# Altium PCB Central_PCB.pcbdoc
Units mil, origin at the board's own origin, x right, y up, seen from the top; angles counter-clockwise.
Board outline 86381 x 3047.24 mil, 2 copper layers (Top Layer, Bottom Layer); 49 components, 120 nets, 266 pads, 28 vias.
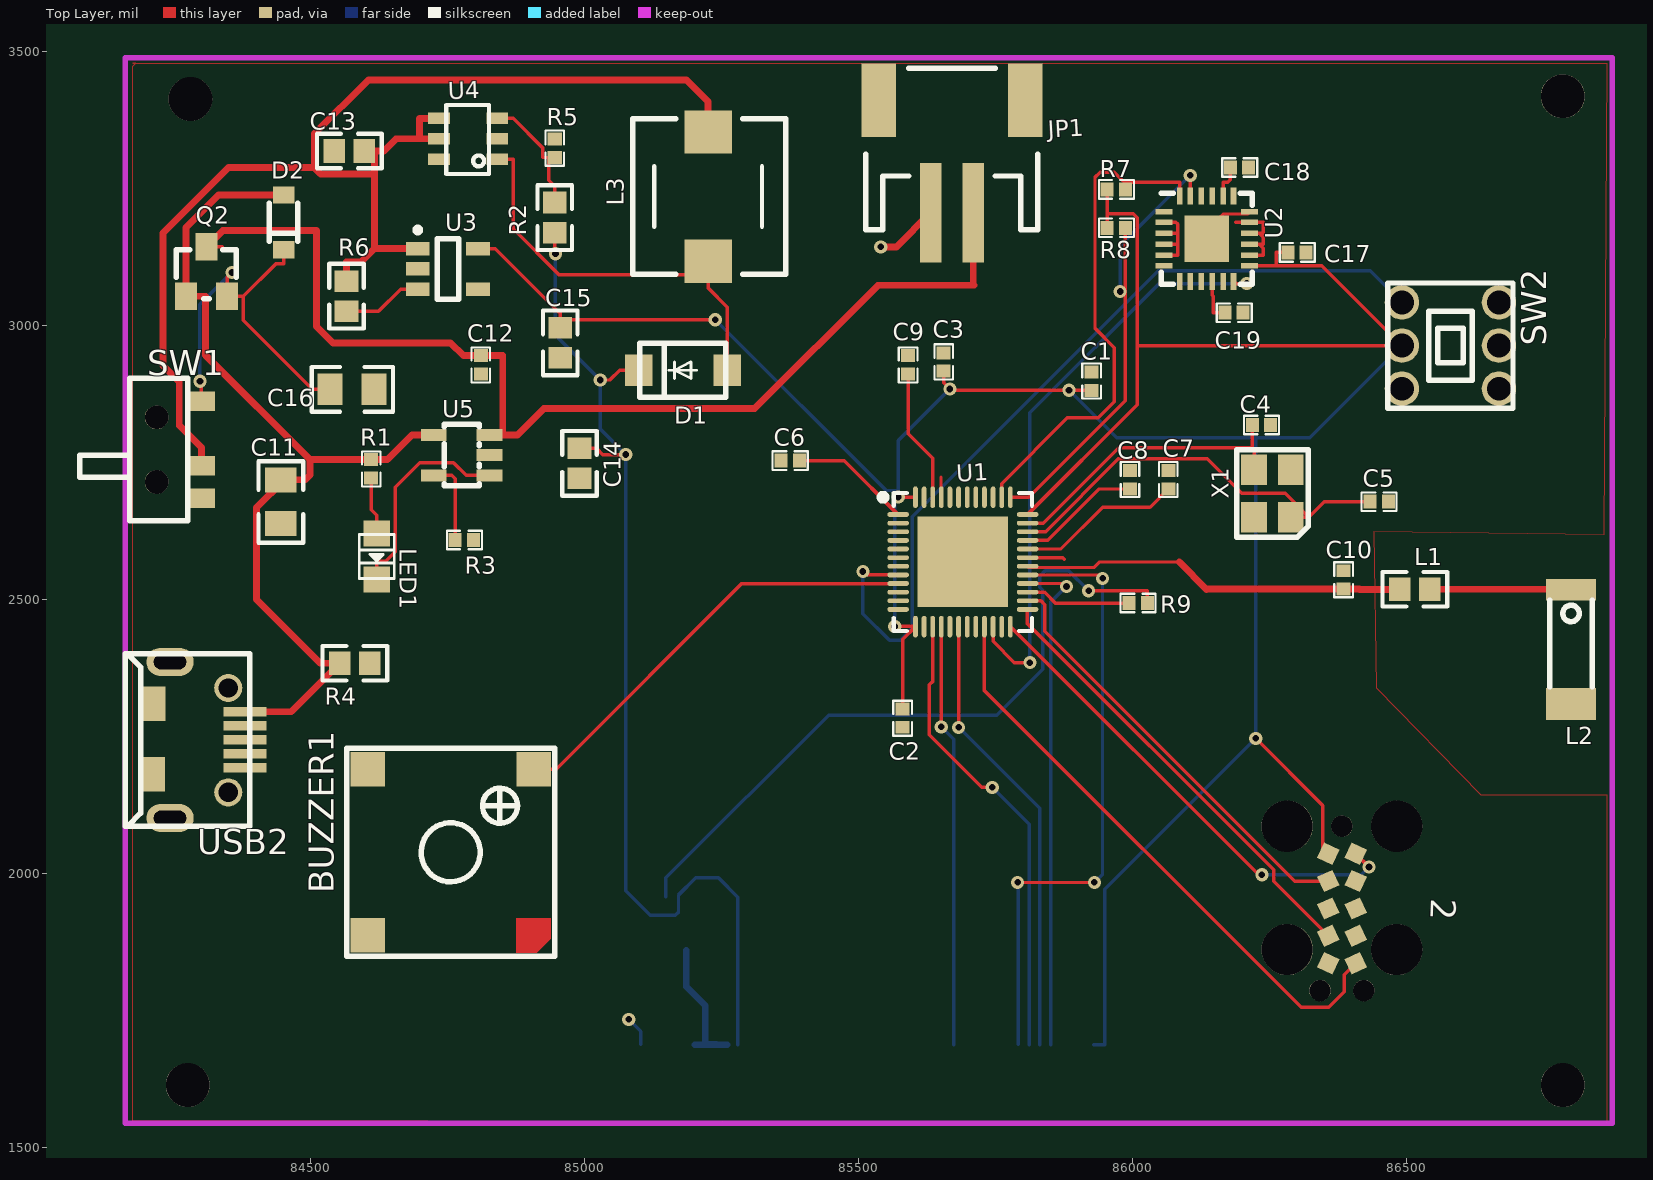
[diagram p0: Top Layer view]
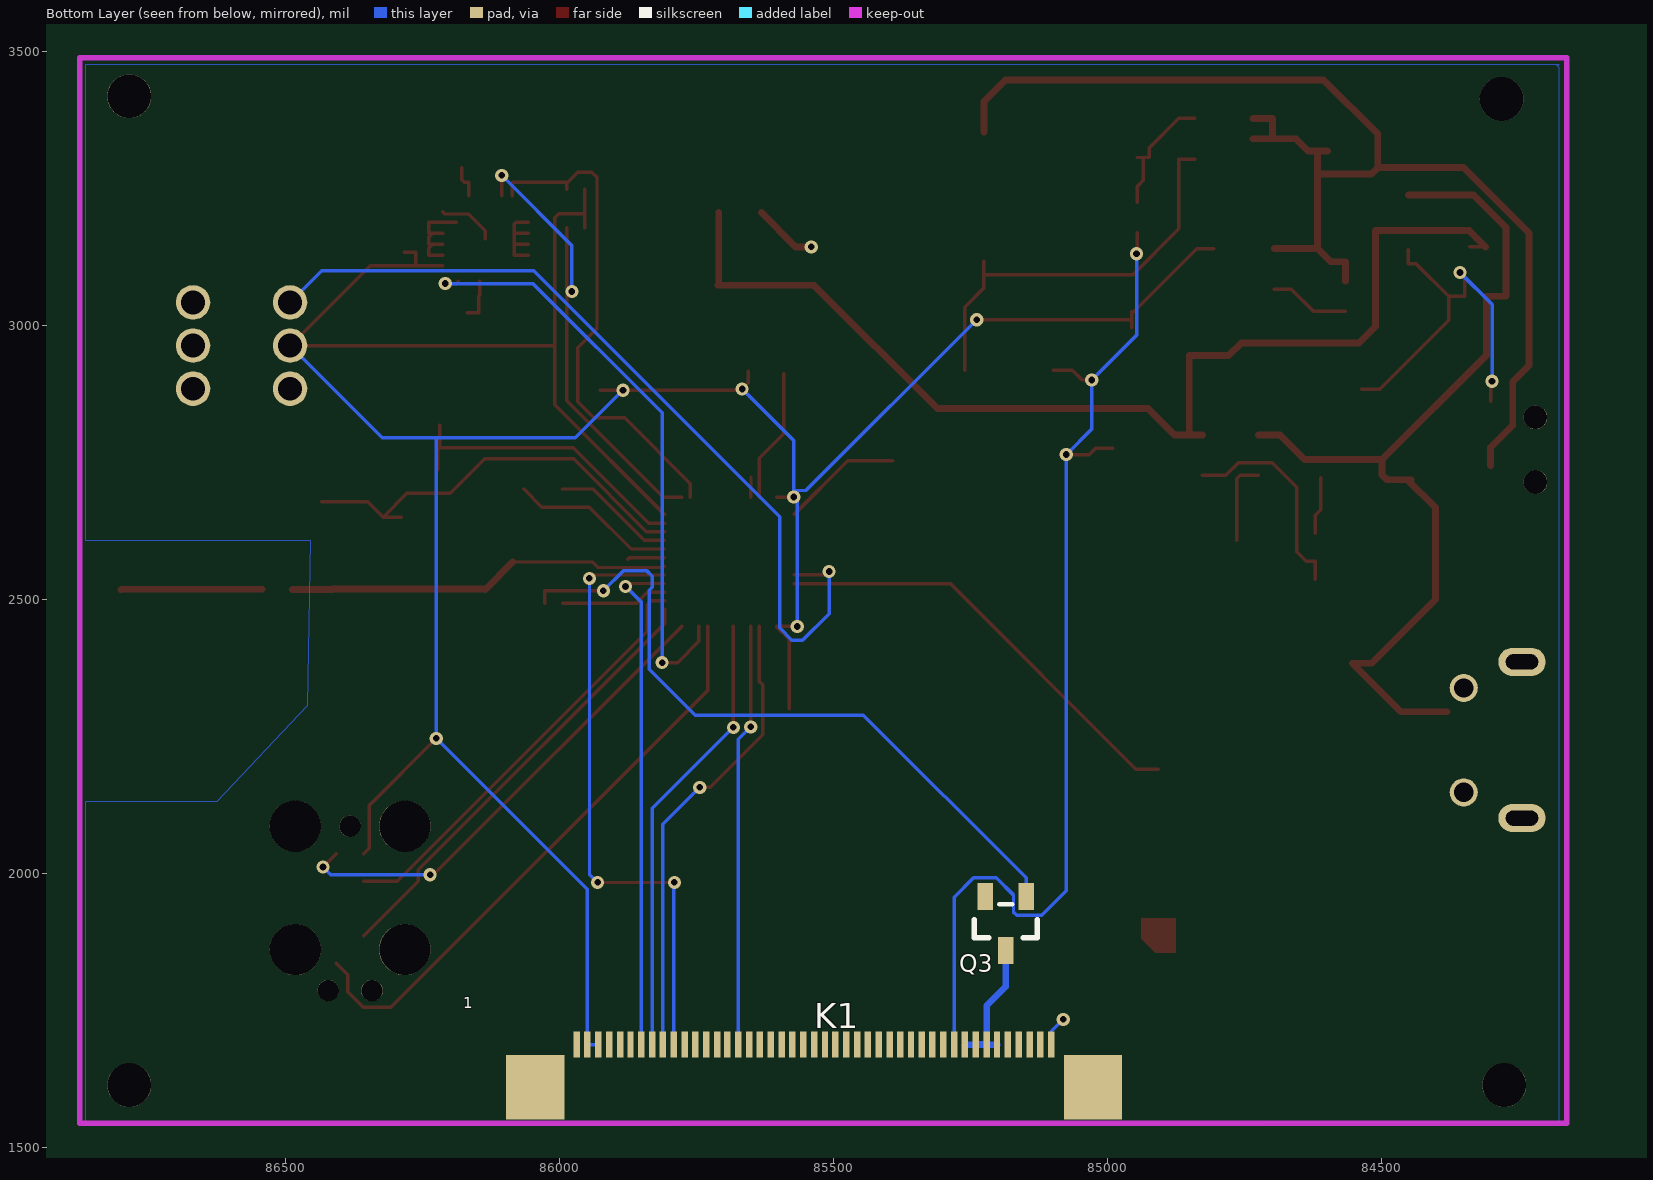
[diagram p1: Bottom Layer view, seen from below]

## Layer stack, top to bottom
Top Layer: signal copper (thickness not stored)
Dielectric: dielectric 12.6, FR-4, Dk 4.8
Bottom Layer: signal copper (thickness not stored)

## Board outline
87381,1000 1000,1000 1000,4047.24 87381,4047.24

## Components (designator, comment, footprint, x,y, rotation, side; value= is the part's Value field where it differs from the comment)
2 "J-LINK" J-LINK_NEEDLE_ADAPTER 86401,1943.62 r270 top
BUZZER1 "GSC8530YA-16R2700" BUZZER-8.5X8.5-4P-SMD 84756,2038.62 r90 top
C1 "4u7" 0402 85926,2898.62 r270 top
C2 "100n" 0402 85581,2283.62 r90 top
C3 "100n" 0402 85656,2933.62 r270 top
C4 "12p" 0402 86236,2818.62 r180 top
C5 "12p" 0402 86451,2678.62 r0 top
C6 "100n" 0402 85376,2753.62 r0 top
C7 "100n" 0402 86066,2718.62 r270 top
C8 "100n" 0402 85996,2718.62 r270 top
C9 "1u" 0402 85591,2928.62 r90 top
C10 "0.8p" 0402 86386,2535.82 r270 top
C11 "4µ7" 0805 84446,2678.62 r90 top
C12 "4µ7" 0402 84811,2928.62 r90 top
C13 "22uF" 0603#1 84571,3318.62 r0 top
C14 "22uF" 0603#1 84991,2748.62 r270 top
C15 "10uF" 0603#1 84956,2968.62 r90 top
C16 "1µ" 0805 84576,2883.62 r180 top
C17 "100n" 0402 86301,3133.62 r180 top
C18 "2.2n" 0402 86196,3288.62 r180 top
C19 "100n" 0402 86186,3023.62 r180 top
D1 "SS34" SMA(DO-214AC) 85176,2918.62 r180 top
D2 "NSR0320" SOD-323 84451,3188.62 r270 top
JP1 "Battery" JST-2-SMD 85671,3308.62 r0 top
K1 "68714514022" 68714514022 85546,1663.62 r0 bottom
L1 "3.9n" 0603#1 86516,2518.62 r0 top
L2 "Sunlord" ANT-SMD2P-5.2X2.1 86801,2413.62 r180 top
L3 "22uH" 7*7*4 85226,3353.62 r270 top
LED1 "charge" LED_0805 84621,2578.62 r270 top
Q2 "SI2301" "SOT-23 323" 84306,3098.62 r0 top
Q3 "2n3904S-RTK/PS" SOT-23_1 85186,1908.62 r180 bottom
R1 "470" 0402 84611,2738.62 r90 top
R2 "7.5k" 0603#2 84946,3228.62 r270 top
R3 "2k" 0402 84781,2608.62 r180 top
R4 "100k" 0603#1 84581,2383.62 r180 top
R5 "1k" 0402 84946,3323.62 r270 top
R6 "100k" 0603#1 84566,3053.62 r270 top
R7 "10k" 0402 85971,3248.62 r180 top
R8 "10k" 0402 85971,3178.62 r180 top
R9 "1k" 0402 86011,2493.62 r0 top
SW1 "K3-1290S-J1" K3-1290S-J1 84301,2773.62 r0 top
SW2 "XKB5858-Z" SW-DIP-5.8X5.8X10 86581,2963.62 r270 top
U1 "2.4GHz" QFN-48_6X6X04P 85691,2568.62 r0 top
U2 "MPU6050" QFN50P400X400X95-25T265X275N 86136,3158.62 r270 top
U3 "AP2112K-3.3TRG1" SOT-25 84751,3103.62 r180 top
U4 "MT3608" SOT-23-6 84841,3303.62 r180 top
U5 "MCP73831" SOT23-5 84776,2763.62 r90 top
USB2 "micro USBFemale" MICRO-USB-1 84296,2243.62 r180 top
X1 "- 32MHz" CRYSTAL-SMD-3225 86256,2693.62 r90 top

## Footprints (in the part's own frame and the unit in brackets; to place one, negate y for a bottom-side part, rotate by r counter-clockwise, add the part's x,y. Pads: shape width x height; smd on the part's side, far side on the other; paste and mask are expansions set on the pad)
7*7*4 [mil]
  rect 79x86.61 smd: 1(0,0) 2(236,0)
  silkscreen extent -24,-138 260,142
0402 [mm]
  rect 0.6x0.65 smd: 1(-0.424,0) 2(0.424,0)
  silkscreen extent -0.82,-0.43 0.81,0.43
0603#1 [mm]
  rect 1x1.1 smd: 1(-0.7,0) 2(0.7,0)
  silkscreen extent -1.5,-0.8 1.5,0.8
0603#2 [mm]
  rect 1x1.1 smd: 1(0.1,0) 2(1.5,0)
  silkscreen extent -0.7,-0.8 2.3,0.8
0805 [mm]
  rect 1.16x1.45 smd: 1(-1.016,0) 2(1.016,0)
  silkscreen extent -1.9,-1.03 1.87,1.04
68714514022 [mil]
  rect 11.8x47.2 smd: 1(423,-24) 2(404,-24) 3(384,-24) 4(364,-24) 5(344,-24) 6(325,-24) 7(305,-24) 8(285,-24) 9(266,-24) 10(246,-24) 11(226,-24) 12(207,-24) 13(187,-24) 14(167,-24) 15(148,-24) 16(128,-24) 17(108,-24) 18(89,-24) 19(69,-24) 20(49,-24) 21(30,-24) 22(10,-24) 23(-10,-24) 24(-30,-24) 25(-49,-24) 26(-69,-24) 27(-89,-24) 28(-108,-24) 29(-128,-24) 30(-148,-24) 31(-167,-24) 32(-187,-24) 33(-207,-24) 34(-226,-24) 35(-246,-24) 36(-266,-24) 37(-285,-24) 38(-305,-24) 39(-325,-24) 40(-344,-24) 41(-364,-24) 42(-384,-24) 43(-404,-24) 44(-423,-24) 45(-443,-24)
  rect 106.3x118.1 smd: 46(499,54) 47(-519,54)
ANT-SMD2P-5.2X2.1 [mm]
  rect 2.3x1.5 smd: 2(0,2.648)
  rect 2.3x1 smd: ANT(0,-2.648)
  silkscreen extent -0.99,-2.15 0.99,1.86
BUZZER-8.5X8.5-4P-SMD [mm]
  rect 1.6x1.6 smd: 1(3.85,-3.85) 2(3.85,3.85) 3(-3.85,3.85)
  round 0 smd: 4(-3.85,-3.85)
  Top Layer region: -4.65,-3.05 -3.05,-3.05 -3.05,-4.65 -4,-4.65 -4.65,-4
  silkscreen extent -4.83,-4.83 4.83,4.83
CRYSTAL-SMD-3225 [mm]
  rect 1.4x1.2 smd: 1(-1.1,-0.85) 2(1.1,-0.85) 3(1.1,0.85) 4(-1.1,0.85)
  silkscreen extent -2.03,-1.65 2.03,1.65
J-LINK_NEEDLE_ADAPTER [mm]
  rect 0.786x0.786 smd rot 155.63: P$1(-2.35,-1.095) P$10(-2.35,0.175)
  rect 0.786x0.786 smd rot 24.37: P$2(-1.08,-1.095) P$3(0.19,-1.095) P$6(2.73,0.175)
  rect 0.786x0.786 smd rot 114.37: P$4(1.46,-1.095) P$7(1.46,0.175) P$8(0.19,0.175)
  rect 0.786x0.786 smd rot 65.63: P$5(2.73,-1.095) P$9(-1.08,0.175)
  round 2.375 hole 2.375 unplated: ""(-3.62,2.08) ""(-3.62,-3) ""(2.095,2.08) ""(2.095,-3)
  round 0.991 hole 0.991 unplated: ""(-3.62,-0.46) ""(4,-1.475) ""(4,0.555)
JST-2-SMD [mil]
  rect 39.4x181.1 smd: 1(-39,-102.5) 2(39,-102.5)
  rect 63x133.9 smd: NC1(-134,102.5) NC2(134,102.5)
  silkscreen extent -157,-134 157,162
K3-1290S-J1 [mm]
  rect 1.25x0.9 smd: 1(0,2.25) 2(0,-0.75) 3(0,-2.25)
  round 1.1 hole 1.1 unplated: ""(-2.075,-1.5) ""(-2.075,1.5)
  silkscreen extent -5.63,-3.3 -0.63,3.3
LED_0805 [mil]
  rect 48x48 smd: 1(-42,0) 2(42,0)
  silkscreen extent -40,-32 40,32
MICRO-USB-1 [mm]
  round 1.3 hole 0.9: 0(-1.371,2.431) 0(-1.371,-2.41)
  oval 2.2x1.3 hole 0.7 slot 1.5 at 0 deg: 0(1.329,3.619) 0(1.329,-3.619)
  rect 1.2x1.6 smd: 0(2.14,-1.683) 0(2.156,1.596)
  rect 2x0.45 smd: 1(-2.156,-1.31) 2(-2.156,-0.66) 3(-2.156,-0.01) 4(-2.156,0.64) 5(-2.156,1.29)
  silkscreen extent -2.36,-4 3.4,4
QFN50P400X400X95-25T265X275N [mil]
  rect 10.2x31.1 smd: 1(-49,-78) 2(-30,-78) 3(-10,-78) 4(10,-78) 5(30,-78) 6(49,-78) 13(49,78) 14(30,78) 15(10,78) 16(-10,78) 17(-30,78) 18(-49,78)
  rect 31.1x10.2 smd: 7(78,-49) 8(78,-30) 9(78,-10) 10(78,10) 11(78,30) 12(78,49) 19(-78,49) 20(-78,30) 21(-78,10) 22(-78,-10) 23(-78,-30) 24(-78,-49)
  rect 84.6x80.7 smd: 25(0,-0.03)
  silkscreen extent -83,-83 83,83
QFN-48_6X6X04P [mm]
  oval 1x0.22 smd: 1(-3,2.201) 2(-3,1.8) 3(-3,1.401) 4(-3,0.999) 5(-3,0.601) 6(-3,0.199) 7(-3,-0.199) 8(-3,-0.601) 9(-3,-0.999) 10(-3,-1.401) 11(-3,-1.8) 12(-3,-2.201) 25(3,-2.201) 26(3,-1.8) 27(3,-1.401) 28(3,-0.999) 29(3,-0.601) 30(3,-0.199) 31(3,0.199) 32(3,0.601) 33(3,0.999) 34(3,1.401) 35(3,1.8) 36(3,2.201)
  oval 0.22x1 smd: 13(-2.198,-3) 14(-1.8,-3) 15(-1.401,-3) 16(-0.999,-3) 17(-0.601,-3) 18(-0.199,-3) 19(0.199,-3) 20(0.601,-3) 21(0.999,-3) 22(1.401,-3) 23(1.8,-3) 24(2.201,-3) 37(2.201,3) 38(1.8,3) 39(1.401,3) 40(0.999,3) 41(0.601,3) 42(0.199,3) 43(-0.199,3) 44(-0.601,3) 45(-0.999,3) 46(-1.401,3) 47(-1.8,3) 48(-2.198,3)
  rect 4.2x4.2 smd: 49(0.001,0.001)
  silkscreen extent -3.85,-3.2 3.2,3.2
SMA(DO-214AC) [mil]
  rect 50x57.9 smd: 1(-85,0) 2(77,0)
  silkscreen extent -82,-49 75,49
SOD-323 [mm]
  rect 0.8x1 smd: 1(-1.27,0) 2(1.27,0)
  silkscreen extent -0.89,-0.66 0.89,0.66
SOT23-5 [mil]
  rect 21.7x47.2 smd: 1(-37,-51) 2(0,-51) 3(37,-51) 4(37,51) 5(-37,51)
  silkscreen extent -56,-32 56,32
"SOT-23 323" [mil]
  rect 40x50 smd: 1(-33,-45) 2(42,-45) 3(4,45)
  silkscreen extent -51,-50 59,40
SOT-23-6 [mm]
  rect 1x0.55 smd: 1(0,0) 2(0,-0.95) 3(0,-1.9) 4(2.7,-1.9) 5(2.7,-0.95) 6(2.7,0)
  silkscreen extent 0.38,-2.51 2.36,0.69
SOT-23_1 [mm]
  rect 0.7x1.25 smd: 1(-0.95,1.25) 2(0.95,1.25) 3(0,-1.25)
  silkscreen extent -1.46,-0.65 1.46,0.9
SOT-25 [mil]
  rect 43.5x24.5 smd: 1(55,-37) 2(55,0) 3(55,37) 4(-55,37) 5(-55,-37)
  silkscreen extent -20,-76 60,55
SW-DIP-5.8X5.8X10 [mm]
  round 1.6 hole 1.1: 1(-2,-2.25) 2(0,-2.25) 3(2,-2.25) 4(2,2.25) 5(0,2.25) 6(-2,2.25)
  silkscreen extent -2.9,-2.9 2.9,2.9

## Free pads (board coordinates)
  round 80 hole 80 unplated: ""(84276,1613.62) ""(84281,3413.62) ""(86786,1613.62) ""(86786,3418.62)

## Via types
v1: diameter 24.02, hole 12.2, Top Layer to Bottom Layer, 23 vias
v2: diameter 24, hole 12, Top Layer to Bottom Layer, 5 vias

## Nets (pads, with @x,y where several pads share a name; then routed paths per layer and width w, separated by ;. In a path a pad name is that pad's centre, name@x,y a point inside that pad or via, vN(x,y) a via of type N, cw(c..) or ccw(c..) an arc to the next point about the centre after c; other vN are vias at no path point)
2_P$5: 2.P$5
2_P$7: 2.P$7
2_P$8: 2.P$8
3.3V: 2.P$1 C1.2 C2.2 C3.2 C15.2 C17.2 K1.2 K1.3 R7.2 R8.2 SW2.2 U1.13 U1.36 U1.48 U2.13 U3.5 | length 5824.3
  Top Layer w6.3: U3.5 84837.3,3140.62 84952.5,3025.42 84956,3025.42 C15.2@84956,3010.82 ; C15.2@84956,2996.12 C15.2@84956,3010.82 ; v1(85239.1,3010.82) C15.2@84956,3010.82 ; v1(85566.7,2450.82) 85604.5,2450.82 85581,2427.32 85581,2321.62 C2.2 ; v1(85573.1,2687.02) U1.48@85604.5,2687.02 ; C3.2 85656,2895.52 v1(85667.2,2884.32) 85669.7,2881.92 v1(85884.8,2881.92) C1.2 ; U1.36@85808.9,2655.22 86009.1,2855.42 86009.1,2963.62 ; R8.2 85954.3,3203.92 ; R7.2 85954.3,3203.92 ; U2.13 86226.6,3109.62 86263,3109.62 ; v1(86225.5,2246.52) 86348,2124.02 86348,2046.02 2.P$1 ; C17.2 86263,3133.62 86263,3109.62 ; 85954.3,3203.92 86002.2,3203.92 86009.1,3197.02 86009.1,2963.62 ; 86009.1,2963.62 SW2.2 86346.4,3109.62 86263,3109.62
  Bottom Layer w6.3: v1(85239.1,3010.82) 85550.8,2699.02 85566.7,2699.02 ; v1(85566.7,2450.82) 85566.7,2699.02 ; v1(85573.1,2687.02) v1@85573.1,2699.02 ; v1(85667.2,2884.32) 85573.1,2790.32 v1@85573.1,2699.02 ; v1(85884.8,2881.92) 85971.7,2795.02 86225.5,2795.02 ; K1.3 K1.2 85950,1720.72 85950,1971.02 v1(86225.5,2246.52) 86225.5,2795.02 ; SW2.2 86323.8,2795.02 86225.5,2795.02 ; 85566.7,2699.02 v1@85573.1,2699.02
5V: C14.1 D1.2 K1.36 R2.2 | length 1974.9
  Top Layer w6.3: R2.2@84946,3169.52 84946,3132.62 v1(84947.3,3131.22) ; C14.1 85022.2,2776.22 85033.7,2764.62 v1(85075.7,2764.62) ; v1(85029.1,2900.72) 85046.5,2900.72 85064.5,2918.62 D1.2
  Bottom Layer w6.3: v1(84947.3,3131.22) 84947.3,2982.42 v1(85029.1,2900.72) 85029.1,2811.22 v1(85075.7,2764.62) 85075.7,1968.62 85120.6,1923.62 85166.3,1923.62 85171.9,1929.22 85171.9,1960.62 85203.3,1992.02 85244.9,1992.02 85280,1956.82 K1.36
ANT: C10.2 L1.1 U1.30 | length 708.7
  Top Layer w5.98: U1.30 85811.26,2558.62 85931,2558.62 85941,2568.62 85951,2568.62 ; 85947.77,2568.62 86086,2568.62
  Top Layer w12.6: 86086,2568.62 86136,2518.62 86136.5,2519.12 C10.2 86400.3,2519.12 86414.6,2519.12 86415.1,2518.62 L1.1
BCK_GND: K1.37 K1.38 K1.39 K1.40 Q3.3 | length 245.3
  Bottom Layer w12.01: Q3.3 85186,1793.62 85221,1758.62 K1.39 K1.40 ; K1.38 K1.37
  Bottom Layer w12.6: K1.39 K1.38
BUZZER: BUZZER1.1 U1.9 | length 805.4
  Top Layer w6.3: BUZZER1.1 84948.6,2190.22 85287.7,2529.22 U1.9@85572.6,2529.22
BUZZER1_3: BUZZER1.3
BUZZER1_4: BUZZER1.4
CONTROL_BUTTON: SW2.1 U1.8 | length 1569.9
  Top Layer w6.3: v1(85508.5,2551.12) 85514.6,2544.92 U1.8@85572.6,2544.92
  Bottom Layer w6.3: v1(85508.5,2551.12) 85508.5,2474.32 85557,2425.72 85576.3,2425.72 85598.7,2448.12 85598.7,2651.42 86047.4,3100.12 86434.6,3100.12 SW2.1@86492.4,3042.32
DEC4: C9.1 U1.46 | length 243.5
  Top Layer w6.3: C9.1 85591,2802.92 85635.8,2758.12 U1.46@85635.8,2687.02
DISPLAY_BCKLIGHT: R9.1 U1.27 | length 193.6
  Top Layer w6.3: U1.27@85808.9,2513.42 85840.1,2513.42 85859.9,2493.62 85973,2493.62 R9.1
DISPLAY_MISO: U1.17
DISPLAY_MOSI: K1.16 U1.16 | length 772.5
  Top Layer w6.3: v1(85651.6,2267.52) U1.16@85651.6,2450.82
  Bottom Layer w6.3: v1(85651.6,2267.52) 85674,2245.12 K1.16
DISPLAY_RESET: K1.7 U1.28 | length 921.6
  Top Layer w5.98: U1.28 85874.75,2529.27 v1(85880.1,2523.92)
  Bottom Layer w6.3: K1.7 85851,2494.82 v1(85880.1,2523.92)
DISPLAY_RS: K1.10 U1.29 | length 1137.1
  Top Layer w5.98: v2(85791,1983.62) v2(85931,1983.62) ; U1.29 85939.65,2544.97 v2(85946,2538.62)
  Bottom Layer w5.98: v2(85791,1983.62) 85792,1982.62 K1.10 ; v2(85931,1983.62) 85946,1998.62 v2(85946,2538.62)
DISPLAY_SCK: K1.9 U1.15 | length 852.1
  Top Layer w6.3: U1.15@85635.8,2450.82 85635.8,2350.32 85629.9,2344.32 85629.9,2252.92 85725.7,2157.12 v1(85744.5,2157.12)
  Bottom Layer w6.3: v1(85744.5,2157.12) 85812,2089.62 K1.9
DISPLAY_SS: K1.8 U1.18 | length 824.4
  Top Layer w6.3: v1(85683.2,2266.72) U1.18@85683.2,2450.82
  Bottom Layer w6.3: v1(85683.2,2266.72) 85831,2118.92 K1.8
GND: 2.P$3 2.P$9 BUZZER1.2 C1.1 C2.1 C3.1 C4.1 C5.2 C6.1 C7.1 C8.1 C9.2 C10.1 C11.1 C12.1 C13.1 C14.2 C15.1 C16.1 C17.1 C18.1 C19.1 JP1.1 K1.1 K1.4 K1.5 K1.6 K1.11 K1.12 K1.13 K1.14 K1.15 K1.45 Q3.1 R3.1 R4.1 R5.1 U1.31 U1.45 U2.1 U2.8 U2.9 U2.11 U2.18 U2.25 U3.2 U4.2 U5.2 USB2.5 X1.2 X1.4 | length 384.1
  Top Layer w5.98: 85651,2723.62 U1.45 ; U1.31 85873.15,2576.47 85876,2573.62 ; U2.25 86135.97,3173.59 86166,3203.62 86210,3203.62 U2.18
  Top Layer w12.6: v2(85541,3143.62) 85569.5,3143.62 JP1.1
  Bottom Layer w5.98: v2(85081,1733.62) 85103,1711.62 K1.45
K1_17: K1.17
K1_18: K1.18
K1_19: K1.19
K1_20: K1.20
K1_21: K1.21
K1_22: K1.22
K1_23: K1.23
K1_24: K1.24
K1_25: K1.25
K1_26: K1.26
K1_27: K1.27
K1_28: K1.28
K1_29: K1.29
K1_30: K1.30
K1_31: K1.31
K1_32: K1.32
K1_33: K1.33
K1_34: K1.34
K1_35: K1.35
K1_41: K1.41
K1_42: K1.42
K1_43: K1.43
K1_44: K1.44
L1_2: L1.2 L2.ANT | length 287
  Top Layer w6.3: L1.2 86572.8,2518.62
  Top Layer w12.01: L1.2 86800.27,2518.62 L2.ANT
L2_2: L2.2
LED1_1: LED1.1 R1.1 | length 105.4
  Top Layer w6.3: R1.1 84611,2664.12 84621,2654.12 LED1.1
LED1_2: LED1.2 U5.1 | length 392.5
  Top Layer w6.3: LED1.2 84621,2570.12 84637.8,2570.12 84654.5,2586.92 84654.5,2704.82 84699.5,2749.72 84761.2,2749.72 84784.3,2726.62 U5.1
MPU_INT: U1.22 U2.12 | length 1085.7
  Top Layer w6.3: U1.22@85746.2,2450.82 85746.2,2423.52 85784.9,2384.82 v1(85813.3,2384.82) ; U2.12 86188.8,3076.82 v1(86209.1,3076.82)
  Bottom Layer w6.3: v1(85813.3,2384.82) 85813.3,2840.92 86049.2,3076.82 v1(86209.1,3076.82)
NC: U2.2 U2.3 U2.4 U2.5 U2.14 U2.15 U2.16 U2.17 | length 350
  Top Layer w6.3: U2.5 86083.1,3128.62 86083.1,3148.62 ; U2.4 86083.1,3148.62 ; U2.3 86083.1,3168.62 ; U2.2 86079.9,3188.62 86083.1,3185.42 86083.1,3168.62 ; 86188.9,3188.62 U2.17 86226.6,3188.62 86239.1,3188.62 86239.1,3168.62 86231.9,3168.62 ; U2.14 86239.1,3128.62 86239.1,3141.42 86231.9,3148.62 ; U2.15 86220.3,3148.62 86226.6,3148.62 86231.9,3148.62 ; U2.16 86226.6,3168.62 86231.9,3168.62 ; 86083.1,3148.62 86083.1,3168.62 ; 86231.9,3148.62 86239.1,3148.62 86239.1,3161.42 86231.9,3168.62
Q2_2: C16.2 D2.2 Q2.2 SW1.1 | length 715
  Top Layer w6.3: v1(84298.3,2898.42) 84301,2895.82 SW1.1 ; v1(84356.9,3097.02) 84348,3088.12 Q2.2 84377.5,3053.62 ; D2.2 84451,3113.32 84437.3,3113.32 84377.5,3053.62 ; C16.2 84503.6,2883.62 84377.5,3009.72 84377.5,3053.62
  Bottom Layer w6.3: v1(84298.3,2898.42) 84298.3,3038.52 v1(84356.9,3097.02)
R2_1: R2.1 R5.2 U4.3 | length 232
  Top Layer w6.3: U4.3 84870.2,3378.42 84923.7,3324.92 84923.7,3306.92 R5.2@84934.8,3306.92 ; R2.1 84946,3253.92 84934.8,3265.02 R5.2@84934.8,3306.92 ; R5.2 R5.2@84934.8,3306.92
R9_2: Q3.2 R9.2 | length 1290
  Top Layer w6.3: v1(85920.5,2515.92) 86027.7,2515.92 R9.2
  Bottom Layer w6.3: Q3.2 85148.6,1991.92 85445.8,2289.12 85752.8,2289.12 85836.6,2372.82 85836.6,2517.02 85831.3,2522.22 85831.3,2542.42 85841.8,2552.92 85883.5,2552.92 v1(85920.5,2515.92)
RESET: 2.P$10 U1.24 | length 882.6
  Top Layer w6.3: U1.24@85777.7,2450.82 86230.9,1997.72 v1(86236.7,1997.72) ; 2.P$10 v1(86432.3,2011.72)
  Bottom Layer w6.3: v1(86236.7,1997.72) 86418.3,1997.72 v1(86432.3,2011.72)
S$27: 
S$29: 
S$31: 
S$33: 
S$35: 
S$37: 
S$39: 
S$41: 
S$47: 
S$49: 
S$51: 
S$67: 
S$69: 
SCL: R8.1 U1.37 U2.23 | length 911
  Top Layer w6.3: U1.37@85777.7,2687.02 85811.6,2687.02 85987.7,2863.22 v1@85987.7,3062.12 ; v1(85978,3062.12) v1@85987.7,3062.12 ; R8.1 85987.7,3156.32 v1@85987.7,3062.12 ; U2.23 v1(86106,3274.32)
  Bottom Layer w6.3: v1(85978,3062.12) 85978,3146.32 v1(86106,3274.32)
SDA: R7.1 U1.38 U2.24 | length 920.7
  Top Layer w6.3: U1.38@85761.9,2687.02 85761.9,2711.72 85881.6,2831.52 85938,2831.52 85967.4,2860.82 85967.4,2959.82 85932.2,2995.02 85932.2,3270.82 85941.5,3280.12 85967.4,3280.12 R7.1@85987.7,3259.82 ; R7.1 R7.1@85987.7,3259.82 ; U2.24 86087,3261.72 85989.6,3261.72 R7.1@85987.7,3259.82
SW1_3: SW1.3
SW2_3: SW2.3
SW2_4: SW2.4
SW2_5: SW2.5
SW2_6: SW2.6
SWCLK: 2.P$4 U1.25 | length 823.2
  Top Layer w6.3: U1.25@85808.9,2481.92 85808.9,2455.92 86258.2,2006.62 86258.2,1985.82 2.P$4
SWDIO: 2.P$2 U1.26 | length 789.3
  Top Layer w6.3: U1.26@85808.9,2497.72 85833.6,2497.72 85840.7,2490.62 85840.7,2442.12 86296.7,1986.12 2.P$2
SWO: 2.P$6 U1.21 | length 1085.2
  Top Layer w6.3: U1.21@85730.4,2450.82 85730.4,2333.82 86308.4,1755.92 86358.6,1755.92 86386.9,1784.22 86386.9,1815.22 2.P$6
U1_1: C6.2 U1.1 | length 220.7
  Top Layer w6.3: C6.2 85474.2,2753.62 U1.1@85572.6,2655.22
U1_2: U1.2
U1_3: U1.3
U1_4: U1.4
U1_5: U1.5
U1_6: U1.6
U1_7: U1.7
U1_10: U1.10
U1_11: U1.11
U1_12: U1.12
U1_14: U1.14
U1_19: U1.19
U1_20: U1.20
U1_23: U1.23
U1_32: C7.2 U1.32 | length 302.3
  Top Layer w5.98: U1.32 85869.65,2592.27 85946,2668.62 86032.7,2668.62 C7.2
U1_33: C8.2 U1.33 | length 225.8
  Top Layer w5.98: U1.33 85846,2607.97 85939.95,2701.92 C8.2
U1_39: U1.39
U1_40: U1.40
U1_41: U1.41
U1_42: U1.42
U1_43: U1.43
U1_47: U1.47
U1_49: U1.49
U2_6: U2.6
U2_7: U2.7
U2_10: C19.2 U2.10 | length 79.2
  Top Layer w6.3: U2.10 86146,3055.52 86148,3053.62 86148,3023.62 C19.2
U2_19: U2.19
U2_20: C18.2 U2.20 | length 62.6
  Top Layer w6.3: U2.20 86166,3261.72 86174.7,3261.72 86179.3,3266.32 C18.2
U2_21: U2.21
U2_22: U2.22
U3_3: R6.2 U3.3 | length 146.8
  Top Layer w6.3: R6.2@84566,3026.02 84624.2,3026.02 84664.7,3066.62 U3.3
U3_4: U3.4
U4_1: D1.1 L3.2 U4.1 | length 760.1
  Top Layer w6.3: U4.1 84870.2,3303.62 84870.2,3176.52 84953.7,3093.12 L3.2@85226,3093.12 ; L3.2 L3.2@85226,3093.12 ; D1.1 85261,3033.62 85226,3068.62 L3.2@85226,3093.12
U4_6: U4.6
U5_3: C12.2 JP1.2 Q2.3 U5.3 | length 2054.7
  Top Layer w6.3: Q2.3 84339.5,3143.62
  Top Layer w12.6: Q2.3 84340,3173.62 84511,3173.62 84511,2998.62 84541,2968.62 84756,2968.62 84779.3,2945.32 C12.2 84851,2945.32 84851,2800.62 ; U5.3 84878,2800.62 84926,2848.62 85311,2848.62 85536,3073.62 85711,3073.62 85710,3074.62 JP1.2
U5_5: R3.2 U5.5 | length 153.7
  Top Layer w6.3: U5.5 84758.1,2726.62 84764.3,2720.42 R3.2
USB2_0: USB2.0
USB2_2: USB2.2
USB2_3: USB2.3
USB2_4: USB2.4
USB_5V: C11.2 D2.1 Q2.1 R1.2 R4.2 U5.4 USB2.1 | length 1721
  Top Layer w12.6: USB2.1 84465.04,2295.21 R4.2 ; C11.2 C11.2@84454.1,2718.62 ; D2.1 84332.4,3238.62 84273,3179.22 Q2.1 84308.8,3053.62 84308.8,2945.92 84499.4,2755.32 ; R4.2@84553.5,2383.62 84518,2383.62 84401.7,2499.92 84401.7,2667.92 84452.3,2718.62 C11.2@84454.1,2718.62 ; U5.4 84685.6,2800.62 84640.3,2755.32 R1.2 84499.4,2755.32 ; C11.2@84454.1,2718.62 84468.2,2718.62 84490.3,2718.62 84499.4,2727.62 84499.4,2755.32
VOUT: C13.2 L3.1 R6.1 SW1.2 U3.1 U4.4 U4.5 | length 2359.1
  Top Layer w12.6: SW1.2 84301,2777.62 84260.6,2817.92 84260.6,2896.92 84230.6,2926.92 84230.6,3168.72 84350.6,3288.72 84506.9,3288.72 ; R6.1 84566,3116.62 84593.1,3116.62 84617.1,3140.62 ; C13.2 C13.2@84617.1,3318.62 ; U3.1 84617.1,3140.62 ; U4.5 84699.3,3341.02 ; U4.4 84699.3,3378.42 84699.3,3341.02 ; L3.1 85226,3408.92 85186.3,3448.62 84606,3448.62 84506.9,3349.52 84506.9,3288.72 ; 84506.9,3288.72 84518.8,3276.92 84617.1,3276.92 ; 84617.1,3140.62 84617.1,3276.92 ; 84617.1,3276.92 C13.2@84617.1,3318.62 ; C13.2@84617.1,3318.62 84634,3318.62 84656.4,3341.02 84699.3,3341.02
XTAL1: C5.1 U1.34 X1.1 | length 769.4
  Top Layer w6.3: U1.34@85808.9,2623.72 85842,2623.72 85974.9,2756.72 86137,2756.72 86199.9,2693.72 86279.2,2693.72 86322.6,2650.32 ; X1.1 86322.6,2650.32 ; C5.1 86350.9,2678.62 86322.6,2650.32
XTAL2: C4.2 U1.35 X1.3 | length 550.5
  Top Layer w6.3: U1.35@85808.9,2639.42 85837.9,2639.42 85975.7,2777.22 86219.3,2777.22 ; C4.2 86219.3,2777.22 ; X1.3 86222.5,2774.02 86219.3,2777.22
pads on no net: 2. JP1.NC1 JP1.NC2 K1.46 K1.47 SW1. U1.44

## Polygon pours and split planes (outlines as drawn)
GND on Bottom Layer (solid): 84176,1546.12 84176,3471.12 84181,3476.12 84176,3476.12 84181,3476.12 86866,3476.12 86866,2608.62 86456,2608.62 86461,2306.12 86626,2131.12 86866,2131.12 86866,1541.12 84176,1546.12
GND on Top Layer (solid): 84176,1548.62 84176,3473.62 84181,3478.62 84176,3478.62 84181,3478.62 86866,3478.62 86861,2618.62 86441,2623.62 86446,2338.62 86636,2143.62 86866,2143.62 86866,1543.62 84176,1548.62

## Silkscreen, mask and mechanical layers (free items; w line width, h text height)
Bottom Overlay:
  text "1" at 86176,1753.78 h19.68
Document:
  rectangle: 84847.02,1500 86224.97,3547.24

## Text inside footprints (layer, text, board x,y; h text height)
JP1: Document "+" at 85766.61,3166.51 h30 r45; Document "-" at 85571,3177.12 h30 r90